# Altium PCB PCB1.PcbDoc (part 2 of 2)
Units mm, origin at the board's own origin, x right, y up, seen from the top; angles counter-clockwise.
Board outline 166.37 x 130.3 mm, 2 copper layers (Top Layer, Bottom Layer); 89 components, 70 nets, 277 pads, 63 vias.
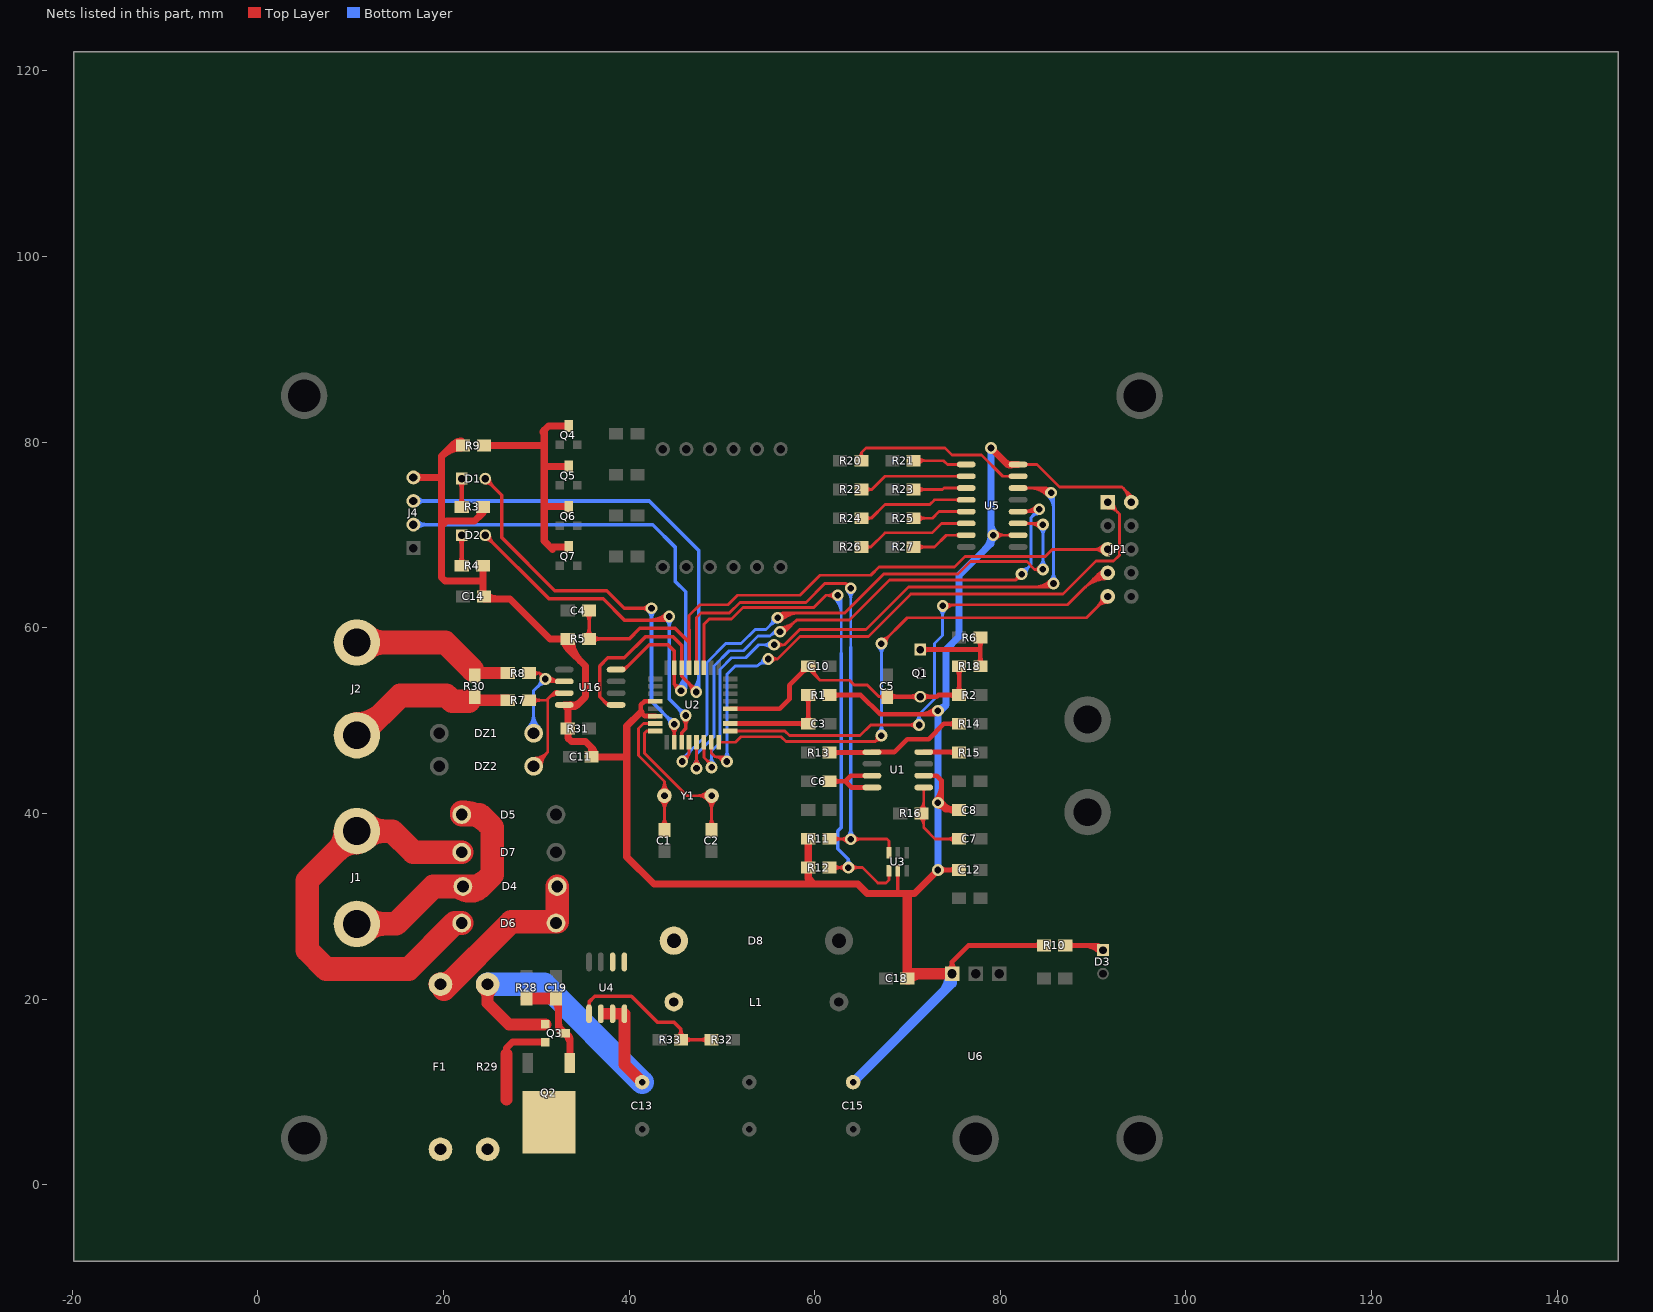
[diagram p2: the nets of this part, all layers, seen from the top]

## Via types
v1: diameter 1.27, hole 0.711, Top Layer to Bottom Layer, 63 vias

## Nets (pads, with @x,y where several pads share a name; then routed paths per layer and width w, separated by ;. In a path a pad name is that pad's centre, name@x,y a point inside that pad or via, vN(x,y) a via of type N, cw(c..) or ccw(c..) an arc to the next point about the centre after c; other vN are vias at no path point) (continued)
LCLK: U2.13 U5.12 | length 79.5
  Top Layer w0.305: v1@46.922,45.191 ccw(c46.098,46.015) 47.263,46.015 ccw(c48.428,46.015) v1@47.604,45.191 ; v1(47.263,44.85) U2.13@47.263,47.664 ; v1@56.261,59.436 ccw(c56.261,60.356) 56.911,59.705 ; v1(56.261,59.563) 56.769,59.563 58.039,60.833 63.754,60.833 68.072,65.151 81.661,65.151 ; v1@56.261,59.741 ccw(c56.261,61.396) 57.432,60.226 ; v1@56.261,60.046 ccw(c56.261,62.437) 57.952,60.746 ; v1@81.823,65.69 cw(c81.241,65.571) 81.661,65.151 ; U5.12@81.915,72.517 83.947,72.517 v1(84.201,72.771) ; v1@82.2,65.313 ccw(c82.081,64.731) 81.661,65.151 ; v1(82.296,65.786) 81.661,65.151 ; U5.12@82.423,72.517 ccw(c82.423,74.549) v1@83.86,73.112 ; U5.12@82.734,72.409 cw(c82.994,72.149) 82.994,72.517 cw(c82.994,72.885) U5.12@82.734,72.625 ; 83.159,72.517 ccw(c83.159,73.813) v1@84.075,72.897
  Bottom Layer w0.305: v1@46.922,45.191 ccw(c46.098,46.015) 47.263,46.015 ccw(c48.428,46.015) v1@47.604,45.191 ; v1(47.263,44.85) 47.263,46.374 49.149,48.26 49.149,55.88 50.8,57.531 52.324,57.531 53.898,59.105 55.168,59.105 55.626,59.563 v1(56.261,59.563) ; 55.208,59.145 cw(c55.914,58.439) v1@56.209,59.393 ; 55.566,59.503 cw(c56.083,58.986) v1@56.298,59.684 ; v1(82.296,65.786) 83.312,66.802 83.312,71.882 v1(84.201,72.771) ; v1@82.296,66.269 ccw(c82.296,67.434) 83.12,66.61 ccw(c83.944,65.786) v1@82.779,65.786 ; v1@83.718,72.771 cw(c82.553,72.771) 83.377,71.947 cw(c84.201,71.123) v1@84.201,72.288
MISO: JP1.9 U2.16 | length 65
  Top Layer w0.305: U2.16@49.663,47.664 51.474,47.664 52.07,48.26 56.388,48.26 56.896,47.752 66.548,47.752 ; v1@66.71,48.291 cw(c66.128,48.172) 66.548,47.752 ; v1@67.087,47.914 ccw(c66.968,47.332) 66.548,47.752 ; v1(67.183,48.387) 66.548,47.752 ; v1(67.183,58.293) 69.977,61.087 89.281,61.087 JP1.9@91.567,63.373 ; v1@67.183,58.776 ccw(c67.183,59.941) 68.007,59.117 ccw(c68.831,58.293) v1@67.666,58.293 ; JP1.9@90.932,63.373 cw(c89.399,63.373) 90.483,62.289 cw(c91.567,61.205) JP1.9@91.567,62.738 ; JP1.9@91.237,63.373 cw(c90.44,63.373) 91.003,62.809 cw(c91.567,62.246) JP1.9@91.567,63.043
  Bottom Layer w0.305: v1@66.842,48.728 ccw(c66.018,49.552) 67.183,49.552 ccw(c68.348,49.552) v1@67.524,48.728 ; v1@66.842,57.952 cw(c66.018,57.128) 67.183,57.128 cw(c68.348,57.128) v1@67.524,57.952 ; v1(67.183,48.387) v1(67.183,58.293)
MOSI: JP1.1 U2.15 | length 78.7
  Top Layer w0.305: U2.15@48.863,47.664 48.863,46.514 49.276,46.101 ; 49.667,46.101 cw(c49.667,45.372) v1@50.374,45.55 ; 50.058,46.101 cw(c50.058,45.47) v1@50.669,45.624 ; v1@50.078,45.476 ccw(c49.276,45.274) 49.276,46.101 ; v1@50.101,45.78 ccw(c49.831,45.894) 50.038,46.101 ; v1@50.359,46.038 cw(c50.245,46.308) 50.038,46.101 ; v1(50.546,45.593) 50.038,46.101 ; v1(54.991,56.642) 56.007,56.642 ; v1@55.365,56.337 cw(c56.007,55.814) 56.007,56.642 ; v1@55.365,56.947 ccw(c56.007,57.47) 56.007,56.642 ; JP1.1@91.567,72.898 cw(c91.567,71.365) 92.651,72.449 cw(c93.735,73.533) JP1.1@92.202,73.533 ; JP1.1@91.567,73.203 cw(c91.567,72.406) 92.131,72.969 cw(c92.694,73.533) JP1.1@91.897,73.533 ; JP1.1@91.567,73.533 92.837,72.263 92.837,67.818 92.202,67.183 90.297,67.183 86.741,63.627 70.358,63.627 65.786,59.055 58.42,59.055 56.007,56.642 ; 49.276,46.101 50.038,46.101
  Bottom Layer w0.305: v1@50.205,45.934 ccw(c49.381,46.758) 50.546,46.758 ccw(c51.711,46.758) v1@50.887,45.934 ; v1(50.546,45.593) 50.546,54.991 51.435,55.88 53.721,55.88 v1(54.991,56.642) ; v1@54.523,56.759 cw(c53.392,57.042) 53.992,56.043 cw(c54.591,55.043) v1@54.874,56.174
NetC1_2: C1.2 U2.7 Y1.2 | length 23.2
  Top Layer w0.305: U2.7@42.838,49.689 41.561,49.689 41.021,49.149 41.021,46.228 43.815,43.434 ; Y1.2@43.366,41.461 cw(c42.282,40.377) 43.815,40.377 cw(c45.348,40.377) Y1.2@44.264,41.461 ; Y1.2@43.368,42.361 ccw(c42.304,43.434) 43.815,43.434 ; C1.2@43.474,38.695 ccw(c42.65,39.519) 43.815,39.519 ccw(c44.98,39.519) C1.2@44.156,38.695 ; Y1.2@43.582,41.677 cw(c43.018,41.113) 43.815,41.113 cw(c44.612,41.113) Y1.2@44.048,41.677 ; Y1.2@43.583,42.144 ccw(c43.029,42.702) 43.815,42.702 ccw(c44.601,42.702) Y1.2@44.047,42.144 ; C1.2@43.815,38.227 Y1.2@43.815,41.91 43.815,43.434 ; Y1.2@44.262,42.361 cw(c45.326,43.434) 43.815,43.434
NetC2_2: C2.2 U2.8 Y1.1 | length 25.4
  Top Layer w0.305: U2.8@42.838,48.889 41.904,48.889 41.656,48.641 41.656,46.482 46.228,41.91 Y1.1@48.895,41.91 C2.2@48.895,38.227 ; Y1.1@48.446,42.359 cw(c47.362,43.443) 47.362,41.91 cw(c47.362,40.377) 48.446,41.461 cw(c47.362,40.377) 48.895,40.377 cw(c50.428,40.377) Y1.1@49.344,41.461 ; C2.2@48.554,38.695 ccw(c47.73,39.519) 48.895,39.519 ccw(c50.06,39.519) C2.2@49.236,38.695 ; Y1.1@48.662,42.143 cw(c48.098,42.707) 48.098,41.91 cw(c48.098,41.113) 48.662,41.677 cw(c48.098,41.113) 48.895,41.113 cw(c49.692,41.113) Y1.1@49.128,41.677
NetC3_1: C3.1 R1.1 U2.18 | length 15.8
  Top Layer w0.508: U2.18@50.888,49.689 59.277,49.689 59.309,49.721 R1.1@59.309,52.756 ; 58.185,49.689 cw(c58.185,48.66) C3.1@58.913,49.388 ; 58.339,49.689 ccw(c58.339,50.5) C3.1@58.913,49.926 ; C3.1@59.04,49.926 ccw(c58.389,50.577) 59.309,50.577 ccw(c60.229,50.577) C3.1@59.578,49.926 ; R1.1@59.04,52.486 cw(c58.389,51.836) 59.309,51.836 cw(c60.229,51.836) R1.1@59.578,52.486
NetC5_1: C5.1 C10.1 Q1.3 R2.1 R18.1 U2.20 | length 45.7
  Top Layer w0.305: C10.1@59.309,55.855 59.309,55.626 60.579,54.356 63.754,54.356 64.262,53.848 65.659,53.848 66.929,52.578 ; C10.1@59.613,55.843 ccw(c60.688,55.77) 59.927,55.008 ; C10.1@59.918,55.822 ccw(c61.578,55.711) 60.401,54.534 ; C5.1@67.413,52.315 ccw(c66.929,52.001) 66.929,52.578 ; C5.1@67.413,52.841 cw(c66.929,53.155) 66.929,52.578 ; C5.1@67.818,52.578 66.929,52.578
  Top Layer w0.508: U2.20@50.888,51.289 56.242,51.289 57.277,52.324 57.277,53.823 C10.1@59.309,55.855 ; 58.442,54.987 ccw(c57.575,55.855) C10.1@58.801,55.855 ; C10.1@58.748,55.294 cw(c59.182,54.86) C10.1@59.182,55.474 ; C5.1@67.818,52.578 73.152,52.578 73.33,52.756 R2.1@75.565,52.756 R18.1@75.565,55.855 ; C5.1@68.087,52.309 cw(c68.738,51.658) 68.738,52.578 cw(c68.738,53.498) C5.1@68.087,52.847 ; Q1.3@71.105,52.309 ccw(c70.454,51.658) 70.454,52.578 ccw(c70.454,53.498) Q1.3@71.105,52.847 ; Q1.3@71.643,52.309 cw(c72.294,51.658) 72.294,52.578 cw(c72.294,53.498) Q1.3@71.643,52.847 ; R2.1@75.169,52.486 ccw(c74.518,51.836) 74.518,52.756 ccw(c74.518,53.676) R2.1@75.169,53.025 ; R2.1@75.296,53.025 ccw(c74.645,53.676) 75.565,53.676 ccw(c76.485,53.676) R2.1@75.834,53.025 ; R18.1@75.296,55.585 cw(c74.645,54.935) 75.565,54.935 cw(c76.485,54.935) R18.1@75.834,55.585
NetC6_1: C6.1 U1.3 U1.4 | length 9.4
  Top Layer w0.508: C6.1@61.595,43.459 63.271,43.459 ; C6.1@61.991,43.19 cw(c62.642,42.54) 62.642,43.459 cw(c62.642,44.379) C6.1@61.991,43.729 ; U1.4@66.167,42.799 63.932,42.799 63.271,43.459 ; U1.3@66.167,44.069 63.881,44.069 63.271,43.459
NetC13_1: C13.1 Q3.1 R29.1 U4.2 U4.3 U4.4 | length 42.9
  Top Layer w1.27: R29.1@24.316,21.141 cw(c23.232,20.057) 24.765,20.057 cw(c26.298,20.057) R29.1@25.214,21.141 ; R29.1@24.765,21.59 24.765,19.558 27.051,17.272 Q3.1@30.988,17.272 ; 37.338,18.415 U4.3@38.227,18.415 U4.4@39.497,18.415 39.497,12.954 C13.1@41.402,11.049
  Bottom Layer w2.54: R29.1@24.765,21.59 30.861,21.59 C13.1@41.402,11.049
NetC19_1: C19.1 Q2.1 Q3.3 R28.2 | length 16.9
  Top Layer w0.762: C19.1@31.951,19.759 cw(c30.905,18.713) 32.385,18.713 ; C19.1@32.131,20.066 32.385,19.812 32.385,17.018 ; 32.385,17.595 ccw(c34.13,17.595) Q3.3@32.896,16.361 ; 32.533,16.87 cw(c31.969,16.307) Q3.3@32.766,16.307 ; Q3.3@32.864,16.38 cw(c33.05,17.018) 32.385,17.018 ; Q3.3@33.144,16.253 cw(c31.971,15.08) 33.63,15.08 ; Q3.3@33.176,16.234 cw(c32.988,15.621) 33.63,15.621 ; Q2.1@33.63,13.106 33.63,15.773 32.385,17.018
  Top Layer w1.27: R28.2@28.956,20.066 C19.1@32.131,20.066
NetD1_1: D1.1 R3.1 | length 5.9
  Top Layer w0.508: R3.1@21.702,73.294 ccw(c21.051,73.945) 21.971,73.945 ccw(c22.891,73.945) R3.1@22.24,73.294 ; D1.1@21.702,75.804 cw(c21.051,75.153) 21.971,75.153 cw(c22.891,75.153) D1.1@22.24,75.804 ; R3.1@21.971,73.025 D1.1@21.971,76.073
NetD1_2: D1.2 U2.10 | length 50.3
  Top Layer w0.381: D1.2@24.511,75.629 cw(c24.511,74.555) 25.27,75.314 cw(c26.029,76.073) D1.2@24.956,76.073 ; D1.2@24.511,76.073 26.289,74.295 26.289,69.723 32.004,64.008 37.592,64.008 39.497,62.103 v1(42.418,62.103) ; v1@42.104,61.789 ccw(c41.345,61.03) 41.345,62.103 ccw(c41.345,63.176) v1@42.104,62.417 ; v1@44.549,49.311 cw(c43.79,48.552) 44.863,48.552 cw(c45.936,48.552) v1@45.177,49.311 ; U2.10@44.863,47.664 v1(44.863,49.625)
  Bottom Layer w0.381: v1@42.104,61.789 cw(c41.345,61.03) 42.418,61.03 cw(c43.491,61.03) v1@42.732,61.789 ; v1(42.418,62.103) 42.418,52.07 v1(44.863,49.625) ; v1@44.419,49.625 ccw(c43.345,49.625) 44.104,50.384 ccw(c44.863,51.143) v1@44.863,50.069
NetD2_1: D2.1 R4.1 | length 6.2
  Top Layer w0.508: R4.1@21.702,66.944 ccw(c21.051,67.595) 21.971,67.595 ccw(c22.891,67.595) R4.1@22.24,66.944 ; D2.1@21.702,69.708 cw(c21.051,69.057) 21.971,69.057 cw(c22.891,69.057) D2.1@22.24,69.708 ; R4.1@21.971,66.675 D2.1@21.971,69.977
NetD2_2: D2.2 U2.11 | length 48
  Top Layer w0.381: D2.2@24.511,69.532 cw(c24.511,68.459) 25.27,69.218 cw(c26.029,69.977) D2.2@24.956,69.977 ; D2.2@24.511,69.977 31.369,63.119 37.211,63.119 39.497,60.833 43.942,60.833 v1(44.323,61.214) ; 42.33,60.833 ccw(c42.33,63.207) v1@44.009,61.528 ; 43.25,60.833 ccw(c43.25,62.287) v1@44.278,61.259 ; U2.11@45.663,47.664 45.663,48.711 46.101,49.149 v1(46.101,50.546) ; v1@45.787,50.232 cw(c45.028,49.473) 46.101,49.473 cw(c47.174,49.473) v1@46.415,50.232
  Bottom Layer w0.381: v1@44.009,60.9 cw(c43.25,60.141) 44.323,60.141 cw(c45.396,60.141) v1@44.637,60.9 ; v1(44.323,61.214) 44.323,52.324 v1(46.101,50.546) ; v1@45.657,50.546 ccw(c44.583,50.546) 45.342,51.305 ccw(c46.101,52.064) v1@46.101,50.99
NetD3_1: D3.1 R10.1 | length 9.9
  Top Layer w0.508: R10.1@86.995,25.781 D3.1@90.551,25.781 ; R10.1@87.391,25.512 cw(c88.042,24.861) 88.042,25.781 cw(c88.042,26.701) R10.1@87.391,26.05 ; 88.913,25.781 cw(c88.913,23.127) D3.1@90.79,25.004 ; 90.139,25.781 cw(c90.139,24.353) D3.1@91.149,25.363 ; D3.1@90.685,25.345 ccw(c90.207,25.437) D3.1@90.551,25.781 ; D3.1@90.987,25.647 cw(c90.895,26.125) D3.1@90.551,25.781 ; D3.1@91.059,25.273 D3.1@90.551,25.781
NetD4_2: D4.2 D6.2 F1.2 | length 20.7
  Top Layer w2.54: F1.2@19.685,21.59 ccw(c19.685,23.736) 21.203,22.219 ; F1.2@20.066,21.082 27.305,28.321 32.258,28.321 D4.2@32.258,32.131
NetD8_2: D8.2 L1.1 U4.5 U4.6
NetDZ1_2: DZ1.2 R8.2 U16.6 | length 23.6
  Top Layer w0.305: R8.2@29.21,55.118 30.353,55.118 ; R8.2@29.711,54.813 cw(c30.353,54.29) 30.353,55.118 ; R8.2@29.711,55.423 ccw(c30.353,55.946) 30.353,55.118 ; v1@30.515,54.579 ccw(c29.933,54.698) 30.353,55.118 ; v1@30.892,54.956 cw(c30.773,55.538) 30.353,55.118 ; v1@31.114,54.609 ccw(c32.03,55.525) U16.6@32.03,54.229 ; v1@31.329,54.824 ccw(c32.766,56.261) U16.6@32.766,54.229 ; U16.6@32.201,54.121 ccw(c31.941,53.861) 31.941,54.229 ccw(c31.941,54.597) U16.6@32.201,54.337 ; U16.6@33.02,54.229 31.242,54.229 v1(30.988,54.483) 30.353,55.118
  Bottom Layer w0.305: DZ1.2@29.107,49.252 ccw(c27.633,50.726) 29.718,50.726 ccw(c31.803,50.726) DZ1.2@30.329,49.252 ; DZ1.2@29.323,49.036 ccw(c28.369,49.99) 29.718,49.99 ccw(c31.067,49.99) DZ1.2@30.113,49.036 ; DZ1.2@29.718,48.641 29.718,53.213 v1(30.988,54.483) ; v1@30.505,54.483 cw(c29.34,54.483) 30.164,53.659 cw(c30.988,52.835) v1@30.988,54
NetDZ2_2: DZ2.2 R7.2 U16.7 | length 22.5
  Top Layer w0.305: R7.2@29.21,52.197 31.115,52.197 31.242,52.324 ; R7.2@29.678,51.856 cw(c30.502,51.032) 30.502,52.197 cw(c30.502,53.362) R7.2@29.678,52.538 ; DZ2.2@29.718,45.085 31.242,46.609 31.242,52.324 ; DZ2.2@29.718,45.644 ccw(c29.718,46.993) 30.672,46.039 ccw(c31.626,45.085) DZ2.2@30.277,45.085 ; DZ2.2@29.718,45.949 ccw(c29.718,48.034) 31.192,46.559 ccw(c32.667,45.085) DZ2.2@30.582,45.085 ; 31.312,52.394 cw(c32.309,51.396) U16.7@32.309,52.807 ; 31.661,52.743 cw(c32.003,52.401) U16.7@32.236,52.825 ; 31.832,52.914 cw(c32.309,52.437) U16.7@32.309,53.111 ; 31.949,53.031 cw(c32.207,52.773) U16.7@32.382,53.093 ; U16.7@32.201,52.851 ccw(c31.941,52.591) 31.941,52.959 ccw(c31.941,53.327) U16.7@32.201,53.067 ; U16.7@33.02,52.959 31.877,52.959 31.242,52.324
NetF1_1: F1.1 Q2.2 Q3.2 R29.2 | length 10
  Top Layer w0.762: 26.797,14.097 26.797,14.732 27.432,15.367 Q3.2@30.988,15.367
  Top Layer w1.27: 26.797,9.144 26.797,14.097
NetQ1_1: Q1.1 R6.2 R18.2 | length 13.9
  Top Layer w0.508: Q1.1@71.374,57.658 77.851,57.658 ; Q1.1@71.643,57.389 cw(c72.294,56.738) 72.294,57.658 cw(c72.294,58.578) Q1.1@71.643,57.927 ; R18.2@77.582,56.124 ccw(c76.931,56.774) 77.851,56.774 ccw(c78.771,56.774) R18.2@78.12,56.124 ; R6.2@77.582,58.684 cw(c76.931,58.034) 77.851,58.034 cw(c78.771,58.034) R6.2@78.12,58.684 ; R18.2@77.851,55.855 R6.2@77.851,58.953
NetQ4_3: Q4.3 Q5.3 Q6.3 Q7.3 R9.2 | length 30.1
  Top Layer w0.762: R9.2@24.384,79.629 30.861,79.629 ; 30.734,81.026 30.734,81.153 31.318,81.737 Q4.3@33.477,81.737 ; 30.861,73.203 31.013,73.05 Q6.3@33.477,73.05 ; 30.861,77.343 30.912,77.394 Q5.3@33.477,77.394 ; 30.861,81.28 30.861,69.342 31.75,68.453 ; 31.496,68.707 Q7.3@33.477,68.707
NetR13_2: R13.2 R14.1 U1.1 | length 18.1
  Top Layer w0.508: R13.2@61.595,46.558 U1.1@66.116,46.558 ; R13.2@61.991,46.289 cw(c62.642,45.638) 62.642,46.558 cw(c62.642,47.478) R13.2@61.991,46.828 ; U1.1@66.167,46.609 68.58,46.609 69.977,48.006 72.263,48.006 73.914,49.657 R14.1@75.565,49.657 ; R14.1@75.169,49.388 ccw(c74.518,48.737) 74.518,49.657 ccw(c74.518,50.577) R14.1@75.169,49.926
NetR15_1: R15.1 U1.8 | length 5.3
  Top Layer w0.508: U1.8@71.755,46.609 75.514,46.609 R15.1@75.565,46.558 ; 74.396,46.609 cw(c74.396,45.516) R15.1@75.169,46.289 ; 74.641,46.609 ccw(c74.641,47.355) R15.1@75.169,46.828
NetR20_1: R20.1 U5.15 | length 20.9
  Top Layer w0.305: R20.1@64.771,78.414 ccw(c64.493,78.867) 65.024,78.867 ; R20.1@65.024,78.003 65.024,78.867 ; R20.1@65.277,78.414 cw(c65.555,78.867) 65.024,78.867 ; U5.15@81.096,76.219 ccw(c80.836,75.959) 80.836,76.327 ccw(c80.836,76.695) U5.15@81.096,76.435 ; U5.15@81.915,76.327 80.264,76.327 77.978,78.613 74.803,78.613 74.041,79.375 65.532,79.375 65.024,78.867
NetR21_1: R21.1 U5.1 | length 8.2
  Top Layer w0.305: R21.1@70.663,78.003 73.889,78.003 74.295,77.597 U5.1@76.327,77.597 ; R21.1@71.131,77.662 cw(c71.955,76.838) 71.955,78.003 cw(c71.955,79.169) R21.1@71.131,78.345 ; U5.1@75.508,77.489 ccw(c75.248,77.229) 75.248,77.597 ccw(c75.248,77.965) U5.1@75.508,77.705
NetR22_1: R22.1 U5.2 | length 13.9
  Top Layer w0.305: R22.1@65.024,74.905 66.142,74.905 ; R22.1@65.531,74.607 cw(c66.142,74.129) 66.142,74.905 ; R22.1@65.531,75.202 ccw(c66.142,75.68) 66.142,74.905 ; U5.2@75.508,76.219 ccw(c75.248,75.959) 75.248,76.327 ccw(c75.248,76.695) U5.2@75.508,76.435 ; U5.2@76.327,76.327 67.564,76.327 66.142,74.905
NetR23_1: R23.1 U5.3 | length 8.1
  Top Layer w0.305: R23.1@70.663,74.905 73.762,74.905 73.914,75.057 U5.3@76.327,75.057 ; R23.1@71.131,74.563 cw(c71.955,73.739) 71.955,74.905 cw(c71.955,76.07) R23.1@71.131,75.246 ; U5.3@75.508,74.949 ccw(c75.248,74.689) 75.248,75.057 ccw(c75.248,75.425) U5.3@75.508,75.165
NetR24_1: R24.1 U5.4 | length 14
  Top Layer w0.305: R24.1@65.024,71.806 66.091,71.806 ; R24.1@65.543,71.525 cw(c66.091,71.132) 66.091,71.806 ; R24.1@65.543,72.087 ccw(c66.091,72.479) 66.091,71.806 ; U5.4@75.508,73.679 ccw(c75.248,73.419) 75.248,73.787 ccw(c75.248,74.155) U5.4@75.508,73.895 ; U5.4@76.327,73.787 72.898,73.787 72.39,73.279 67.564,73.279 66.091,71.806
NetR25_1: R25.1 U5.5 | length 8.4
  Top Layer w0.305: R25.1@70.663,71.806 72.695,71.806 73.406,72.517 U5.5@76.327,72.517 ; R25.1@71.131,71.465 cw(c71.955,70.641) 71.955,71.806 cw(c71.955,72.971) R25.1@71.131,72.147 ; U5.5@75.508,72.409 ccw(c75.248,72.149) 75.248,72.517 ccw(c75.248,72.885) U5.5@75.508,72.625
NetR26_1: R26.1 U5.6 | length 14.1
  Top Layer w0.305: R26.1@65.024,68.707 66.04,68.707 ; R26.1@65.556,68.444 cw(c66.04,68.13) 66.04,68.707 ; R26.1@65.556,68.97 ccw(c66.04,69.284) 66.04,68.707 ; U5.6@75.508,71.139 ccw(c75.248,70.879) 75.248,71.247 ccw(c75.248,71.615) U5.6@75.508,71.355 ; U5.6@76.327,71.247 73.66,71.247 72.644,70.231 67.564,70.231 66.04,68.707
NetR27_1: R27.1 U5.7 | length 8.6
  Top Layer w0.305: R27.1@70.663,68.707 72.898,68.707 74.168,69.977 U5.7@76.327,69.977 ; R27.1@71.131,68.366 cw(c71.955,67.542) 71.955,68.707 cw(c71.955,69.872) R27.1@71.131,69.048 ; U5.7@75.508,69.869 ccw(c75.248,69.609) 75.248,69.977 ccw(c75.248,70.345) U5.7@75.508,70.085
NetR32_1: R32.1 R33.2 U4.1 | length 22.4
  Top Layer w0.381: U4.1@35.687,18.415 35.687,19.685 36.322,20.32 40.259,20.32 43.053,17.526 44.831,17.526 45.593,16.764 R33.2@45.593,15.621 R32.1@48.895,15.621 ; R33.2@45.279,15.935 ccw(c44.52,16.694) 45.593,16.694 ccw(c46.666,16.694) R33.2@45.907,15.935 ; R33.2@46.034,15.307 cw(c46.793,14.548) 46.793,15.621 cw(c46.793,16.694) R33.2@46.034,15.935 ; R32.1@48.454,15.307 ccw(c47.695,14.548) 47.695,15.621 ccw(c47.695,16.694) R32.1@48.454,15.935
OUT0-5V: C7.1 R16.2 U1.5 | length 16.1
  Top Layer w0.305: R16.2@71.287,39.664 cw(c70.156,38.533) 71.755,38.533 ; R16.2@71.287,40.346 ccw(c70.156,41.477) 71.755,41.477 ; R16.2@71.502,39.879 cw(c70.892,39.269) 71.755,39.269 ; R16.2@71.502,40.131 ccw(c70.892,40.741) 71.755,40.741 ; U1.5@71.647,42.691 cw(c71.387,42.431) 71.755,42.431 cw(c72.123,42.431) U1.5@71.863,42.691 ; 71.755,39.147 cw(c72.486,39.147) R16.2@71.969,39.664 ; 71.755,40.863 ccw(c72.486,40.863) R16.2@71.969,40.346 ; U1.5@71.755,42.799 71.755,38.481 72.974,37.262 C7.1@75.565,37.262 ; C7.1@75.097,36.921 ccw(c74.273,36.097) 74.273,37.262 ccw(c74.273,38.427) C7.1@75.097,37.603
RST: C4.1 JP1.5 R5.1 U2.29 | length 77.3
  Top Layer w0.305: 46.463,59.798 46.463,61.322 47.625,62.484 50.673,62.484 51.689,63.5 58.42,63.5 60.579,65.659 66.04,65.659 66.929,66.548 75.057,66.548 76.2,67.691 84.836,67.691 85.598,68.453 JP1.5@91.567,68.453 ; JP1.5@91.118,68.004 ccw(c90.034,66.92) 90.034,68.453 ccw(c90.034,69.986) JP1.5@91.118,68.902 ; JP1.5@91.334,68.22 ccw(c90.77,67.656) 90.77,68.453 ccw(c90.77,69.25) JP1.5@91.334,68.686
  Top Layer w0.381: R5.1@35.373,59.115 ccw(c34.614,59.874) 35.687,59.874 ccw(c36.76,59.874) R5.1@36.001,59.115 ; C4.1@35.373,61.535 cw(c34.614,60.776) 35.687,60.776 cw(c36.76,60.776) C4.1@36.001,61.535 ; C4.1@35.687,61.849 R5.1@35.687,58.801 40.005,58.801 41.148,59.944 44.958,59.944 46.463,58.439 ; R5.1@36.128,58.487 cw(c36.887,57.728) 36.887,58.801 cw(c36.887,59.874) R5.1@36.128,59.115 ; U2.29@46.463,55.714 46.463,59.798
RXD: J4.3 U2.30 U16.1 | length 76.6
  Top Layer w0.381: 37.398,52.01 ccw(c37.897,52.508) U16.1@37.897,51.803 ; U16.1@38.608,51.689 37.719,51.689 36.83,52.578 36.83,55.88 37.719,56.769 39.497,56.769 41.783,59.055 44.704,59.055 45.663,58.096 45.663,54.794 47.244,53.213 v1(47.244,53.086) ; 46.395,54.062 cw(c45.42,53.086) v1@46.799,53.086 ; 46.702,53.755 ccw(c47.244,54.297) v1@47.244,53.53
  Bottom Layer w0.381: J4.3@16.764,73.66 42.164,73.66 47.498,68.326 47.498,53.34 v1(47.244,53.086) ; J4.3@17.16,73.264 cw(c18.115,72.309) 18.115,73.66 cw(c18.115,75.011) J4.3@17.16,74.056 ; v1@46.93,53.4 ccw(c45.558,54.772) 47.498,54.772 ; v1@47.199,53.131 ccw(c46.477,53.853) 47.498,53.853
SCK: JP1.7 U2.17 | length 71
  Top Layer w0.305: U2.17@50.888,48.889 56.775,48.889 57.277,48.387 64.897,48.387 66.04,49.53 v1(71.247,49.53) ; v1@70.906,49.189 ccw(c70.082,48.365) 70.082,49.53 ccw(c70.082,50.695) v1@70.906,49.871 ; v1(73.787,62.357) 73.914,62.484 87.249,62.484 90.678,65.913 ; v1@73.913,62.231 cw(c74.523,61.621) 74.523,62.484 ; v1@74.128,62.016 cw(c75.259,60.885) 75.259,62.484 ; v1@74.128,62.698 ccw(c74.645,63.215) 74.645,62.484 ; 88.965,64.2 cw(c91.567,61.599) JP1.7@91.567,65.278 ; 89.486,64.721 cw(c91.567,62.639) JP1.7@91.567,65.583 ; 90.006,65.241 cw(c91.567,63.68) JP1.7@91.567,65.888 ; 90.526,65.761 cw(c91.567,64.721) JP1.7@91.567,66.192 ; JP1.7@90.966,65.707 ccw(c90.678,65.608) 90.678,65.913 ; JP1.7@90.966,66.119 cw(c90.678,66.218) 90.678,65.913 ; JP1.7@91.567,65.913 90.678,65.913
  Bottom Layer w0.305: v1@70.91,49.876 ccw(c70.135,50.673) 71.247,50.673 ; v1(71.247,49.53) 71.247,50.673 ; v1@71.584,49.876 cw(c72.359,50.673) 71.247,50.673 ; v1@73.446,62.016 cw(c72.622,61.192) 73.787,61.192 cw(c74.952,61.192) v1@74.128,62.016 ; v1(73.787,62.357) 73.787,59.182 72.898,58.293 72.898,52.324 71.247,50.673
SCL: R11.1 U2.28 U3.3 | length 68.3
  Top Layer w0.305: U2.28@47.263,55.714 47.263,61.106 47.752,61.595 50.8,61.595 51.943,62.738 59.055,62.738 61.087,64.77 63.373,64.77 ; R11.1@61.595,37.262 67.767,37.262 68.011,37.018 U3.3@68.011,35.773 ; R11.1@62.063,36.921 cw(c62.887,36.097) 62.887,37.262 cw(c62.887,38.427) R11.1@62.063,37.603 ; 62.593,37.262 cw(c62.593,35.923) v1@63.54,36.87 ; 62.839,37.262 ccw(c62.839,38.253) v1@63.54,37.552 ; v1@63.436,64.449 ccw(c63.166,64.563) 63.373,64.77 ; v1@63.694,64.707 cw(c63.58,64.977) 63.373,64.77 ; v1(63.881,64.262) 63.373,64.77 ; v1@64.222,36.87 cw(c65.169,35.923) 65.169,37.262 ; v1@64.222,37.552 ccw(c64.923,38.253) 64.923,37.262
  Bottom Layer w0.305: v1@63.54,63.921 cw(c62.716,63.097) 63.881,63.097 cw(c65.046,63.097) v1@64.222,63.921 ; 63.881,57.912 v1(63.881,64.262)
  Bottom Layer w0.381: v1@63.567,37.525 ccw(c62.808,38.284) 63.881,38.284 ccw(c64.954,38.284) v1@64.195,37.525 ; v1(63.881,37.211) 63.881,57.912
SCLK: U2.12 U5.11 | length 82.5
  Top Layer w0.305: v1(45.72,45.593) 46.463,46.336 ; v1@45.757,46.074 ccw(c45.825,46.974) 46.463,46.336 ; v1@46.201,45.63 cw(c47.101,45.698) 46.463,46.336 ; U2.12@46.463,47.664 46.463,46.336 ; v1@55.917,61.177 cw(c56.927,60.167) 56.927,61.595 ; v1(56.007,61.087) 56.515,61.595 ; v1@56.133,60.961 cw(c57.663,59.431) 57.663,61.595 ; v1@56.194,61.532 ccw(c56.308,61.802) 56.515,61.595 ; v1@56.348,60.746 cw(c58.399,58.695) 58.399,61.595 ; v1@56.452,61.274 cw(c56.722,61.388) 56.515,61.595 ; U5.11@81.915,71.247 84.455,71.247 v1(84.582,71.12) ; U5.11@82.734,71.139 cw(c82.994,70.879) 82.994,71.247 cw(c82.994,71.615) U5.11@82.734,71.355 ; 83.11,71.247 cw(c83.11,69.648) v1@84.241,70.779 ; 83.724,71.247 ccw(c83.724,71.978) v1@84.241,71.461 ; 83.846,71.247 cw(c83.846,70.384) v1@84.456,70.994 ; v1@84.177,66.031 ccw(c83.693,65.717) 83.693,66.294 ; v1@84.177,66.557 cw(c83.693,66.871) 83.693,66.294 ; v1(84.582,66.294) 83.693,66.294 ; 56.515,61.595 63.246,61.595 67.437,65.786 75.438,65.786 76.784,67.132 82.855,67.132 83.693,66.294
  Bottom Layer w0.305: v1(45.72,45.593) 45.72,45.847 48.387,48.514 48.387,56.261 50.419,58.293 52.07,58.293 53.594,59.817 54.737,59.817 v1(56.007,61.087) ; v1@45.72,46.076 ccw(c45.72,46.627) 46.11,46.237 ; v1@45.898,45.593 cw(c46.94,45.593) 46.203,46.33 ; v1@46.203,45.593 cw(c47.981,45.593) 46.723,46.85 ; v1@55.524,61.087 cw(c54.359,61.087) 55.183,60.263 cw(c56.007,59.439) v1@56.007,60.604 ; v1@84.241,66.635 ccw(c83.417,67.459) 84.582,67.459 ccw(c85.747,67.459) v1@84.923,66.635 ; v1@84.241,70.779 cw(c83.417,69.955) 84.582,69.955 cw(c85.747,69.955) v1@84.923,70.779 ; v1(84.582,66.294) v1(84.582,71.12)
SDA: R12.1 U2.27 U3.4 | length 71.4
  Top Layer w0.305: U2.27@48.063,55.714 48.063,60.382 48.641,60.96 51.054,60.96 52.273,62.179 59.893,62.179 61.214,63.5 v1(62.484,63.5) ; R12.1@61.595,34.163 65.151,34.163 66.802,32.512 67.691,32.512 68.011,32.832 U3.4@68.011,33.823 ; R12.1@62.063,33.822 cw(c62.887,32.998) 62.887,34.163 cw(c62.887,35.328) R12.1@62.063,34.504 ; v1@62.143,63.159 ccw(c61.319,62.335) 61.319,63.5 ccw(c61.319,64.665) v1@62.143,63.841 ; v1@63.286,33.822 ccw(c62.462,32.998) 62.462,34.163 ccw(c62.462,35.328) v1@63.286,34.504 ; v1@63.968,33.822 cw(c64.792,32.998) 64.792,34.163 cw(c64.792,35.328) v1@63.968,34.504
  Bottom Layer w0.305: v1@62.143,63.159 cw(c60.399,61.415) 62.865,61.415 ; v1@62.358,63.374 cw(c61.135,62.151) 62.865,62.151 ; v1(62.484,63.5) 62.865,63.119 62.865,57.277 ; v1@62.574,63.59 cw(c61.871,62.887) 62.865,62.887
  Bottom Layer w0.381: 62.865,57.277 62.865,38.481 62.484,38.1 62.484,36.195 63.627,35.052 ; v1@63.36,34.519 ccw(c62.96,35.052) 63.627,35.052 ; v1(63.627,34.163) 63.627,35.052 ; v1@63.894,34.519 cw(c64.294,35.052) 63.627,35.052
SDI: U2.14 U5.14 | length 88.9
  Top Layer w0.305: U2.14@48.063,47.664 48.063,46.044 48.895,45.212 v1(48.895,44.958) ; 48.436,45.671 cw(c47.756,44.991) v1@48.717,44.963 ; 48.505,45.602 ccw(c48.895,45.992) v1@48.895,45.441 ; v1(55.626,58.166) 56.741,58.166 ; v1@55.978,57.836 cw(c56.741,57.12) 56.741,58.166 ; v1@55.978,58.496 ccw(c56.741,59.212) 56.741,58.166 ; U5.14@81.915,75.057 84.963,75.057 ; U5.14@82.734,74.949 cw(c82.994,74.689) 82.994,75.057 cw(c82.994,75.425) U5.14@82.734,75.165 ; 83.079,75.057 cw(c83.079,72.157) v1@85.13,74.208 ; 83.64,64.389 ccw(c83.64,66.855) v1@85.384,65.111 ; 83.815,75.057 cw(c83.815,72.893) v1@85.345,74.423 ; 84.376,64.389 ccw(c84.376,66.119) v1@85.599,64.896 ; 84.551,75.057 cw(c84.551,73.629) v1@85.561,74.639 ; v1@85.026,74.736 ccw(c84.756,74.85) 84.963,75.057 ; 85.112,64.389 ccw(c85.112,65.383) v1@85.815,64.68 ; v1@85.284,74.994 cw(c85.17,75.264) 84.963,75.057 ; v1(85.471,74.549) 84.963,75.057 ; v1(85.725,64.77) 85.344,64.389 70.104,64.389 65.532,59.817 58.392,59.817 56.741,58.166
  Bottom Layer w0.305: v1@48.554,45.299 ccw(c47.73,46.123) 48.895,46.123 ccw(c50.06,46.123) v1@49.236,45.299 ; v1(48.895,44.958) 48.895,46.736 49.784,47.625 49.784,55.499 51.054,56.769 52.578,56.769 53.975,58.166 v1(55.626,58.166) ; v1@55.285,57.825 ccw(c54.461,57.001) 54.461,58.166 ccw(c54.461,59.331) v1@55.285,58.507 ; v1@85.13,74.208 cw(c83.693,72.771) 85.725,72.771 ; v1@85.345,74.423 cw(c84.429,73.507) 85.725,73.507 ; v1@85.384,65.111 ccw(c84.56,65.935) 85.725,65.935 ccw(c86.89,65.935) v1@86.066,65.111 ; v1(85.471,74.549) 85.725,74.295 v1(85.725,64.77)
T485A+: J2.1 R8.1 R30.2 | length 22
  Top Layer w0.305: R30.2@23.368,54.864 R30.2@23.622,55.118
  Top Layer w1.27: R30.2@23.622,55.118 R8.1@26.924,55.118
  Top Layer w2.54: J2.1@10.668,58.42 20.193,58.42 R30.2@23.114,55.499 ; J2.1@11.538,57.55 cw(c13.637,55.451) 13.637,58.42 cw(c13.637,61.389) J2.1@11.538,59.29
T485B-: J2.2 R7.1 R30.1 | length 21.6
  Top Layer w0.305: R30.1@23.368,52.578 R30.1@23.749,52.197
  Top Layer w1.27: R30.1@23.368,52.451 ccw(c23.981,53.064) R30.1@23.981,52.197 ; R30.1@23.749,52.197 R7.1@26.924,52.197
  Top Layer w2.54: J2.2@10.668,48.42 11.082,48.42 15.367,52.705 20.32,52.705 20.955,52.07 R30.1@22.733,52.07 ; J2.2@10.668,49.65 ccw(c10.668,53.619) 13.474,50.812
TXD: J4.2 U2.31 U16.4 | length 67.1
  Top Layer w0.381: U16.4@38.608,55.499 39.497,55.499 42.164,58.166 44.196,58.166 44.863,57.499 44.863,53.943 ; U16.4@39.319,55.613 ccw(c39.319,56.318) 39.818,55.82 ; v1@45.149,53.225 ccw(c44.173,53.252) 44.863,53.943 ; v1@45.581,53.657 cw(c45.554,54.633) 44.863,53.943 ; v1(45.593,53.213) 44.863,53.943
  Bottom Layer w0.381: J4.2@16.764,71.12 42.545,71.12 44.958,68.707 44.958,65.024 46.101,63.881 46.101,53.721 ; J4.2@17.16,70.724 cw(c18.115,69.769) 18.115,71.12 cw(c18.115,72.471) J4.2@17.16,71.516 ; v1@45.279,53.527 ccw(c43.293,55.513) 46.101,55.513 ; v1@45.548,53.258 ccw(c44.213,54.593) 46.101,54.593 ; v1(45.593,53.213) 46.101,53.721 ; v1@45.734,53.635 ccw(c45.848,53.974) 46.101,53.721 ; v1@45.818,52.988 ccw(c45.133,53.673) 46.101,53.673 ; v1@46.015,53.354 cw(c46.354,53.468) 46.101,53.721
VCC: C8.2 C11.2 C12.2 C14.2 C15.1 C18.2 J4.4 JP1.2 R1.2 R3.2 R4.2 R5.2 R9.1 R10.2 R11.2 R12.2 R31.2 U1.6 U2.4 U2.6 U3.5 U5.10 U5.16 U6.3 U16.8 | length 315.3
  Top Layer w0.305: v1(79.248,69.977) U5.10@81.915,69.977 ; v1@79.589,69.636 cw(c80.413,68.812) 80.413,69.977 cw(c80.413,71.142) v1@79.589,70.318 ; U5.10@81.096,69.869 ccw(c80.836,69.609) 80.836,69.977 ccw(c80.836,70.345) U5.10@81.096,70.085 ; U5.16@81.915,77.597 83.947,77.597 86.36,75.184 93.091,75.184 94.107,74.168 JP1.2@94.107,73.533 ; U5.16@82.734,77.489 cw(c82.994,77.229) 82.994,77.597 cw(c82.994,77.965) U5.16@82.734,77.705 ; 93.238,75.037 cw(c91.918,73.717) JP1.2@93.778,73.561 ; 93.702,74.573 cw(c92.774,73.645) JP1.2@94.082,73.535
  Top Layer w0.381: C14.2@24.257,63.246 C14.2@24.384,63.119 ; U3.5@68.961,33.823 68.961,31.496 69.088,31.369
  Top Layer w0.508: U16.8@33.02,51.689 U16.8@33.274,51.435 ; U2.6@42.838,50.489 41.713,50.489 41.275,50.927 41.275,51.689 41.675,52.089 U2.4@42.838,52.089 ; R1.2@61.595,52.756 64.973,52.756 67.056,50.673 72.898,50.673 v1(73.279,51.054) ; R1.2@61.991,52.486 cw(c62.642,51.836) 62.642,52.756 cw(c62.642,53.676) R1.2@61.991,53.025 ; 71.439,50.673 ccw(c71.439,52.894) v1@73.01,51.323 ; U1.6@71.755,44.069 73.152,44.069 73.66,43.561 73.66,41.275 74.574,40.361 ; 72.666,50.673 ccw(c72.666,51.667) v1@73.369,50.964 ; v1@73.01,41.417 ccw(c71.439,42.988) 73.66,42.988 ; v1(73.279,33.909) C12.2@75.565,33.909 ; v1@73.279,40.767 cw(c73.279,39.847) 73.929,40.498 cw(c74.58,41.148) v1@73.66,41.148 ; v1(73.279,41.148) 74.066,40.361 C8.2@75.565,40.361 ; v1@73.279,41.275 cw(c73.279,40.355) 73.929,41.006 ; v1@73.369,41.058 ccw(c72.666,41.761) 73.66,41.761 ; v1@73.548,33.64 cw(c74.199,32.989) 74.199,33.909 cw(c74.199,34.829) v1@73.548,34.178 ; 74.092,40.843 ccw(c74.769,41.521) C8.2@75.248,40.691 ; U6.3@74.43,23.114 ccw(c73.558,24.003) 74.803,24.003 ; 74.56,40.375 ccw(c75.112,40.926) C8.2@75.501,40.251 ; U6.3@74.803,22.733 74.803,24.003 ; C12.2@75.169,33.64 ccw(c74.518,32.989) 74.518,33.909 ccw(c74.518,34.829) C12.2@75.169,34.178 ; C8.2@75.169,40.091 ccw(c74.518,39.441) 74.518,40.361 ccw(c74.518,41.28) C8.2@75.169,40.63 ; U6.3@75.176,23.114 cw(c76.048,24.003) 74.803,24.003 ; R10.2@84.313,25.512 ccw(c83.662,24.861) 83.662,25.781 ccw(c83.662,26.701) R10.2@84.313,26.05 ; R10.2@84.709,25.781 76.581,25.781 74.803,24.003
  Top Layer w0.762: J4.4@16.764,76.2 19.812,76.2 ; J4.4@17.025,75.939 cw(c17.655,75.309) 17.655,76.2 cw(c17.655,77.091) J4.4@17.025,76.461 ; 19.803,78.477 cw(c21.971,76.309) R9.1@21.971,79.375 ; 19.812,70.993 20.32,71.501 23.368,71.501 24.257,72.39 R3.2@24.257,73.025 ; 20.447,79.121 cw(c21.362,78.206) R9.1@21.871,79.396 ; 21.104,79.778 cw(c21.971,78.911) R9.1@21.971,80.137 ; R9.1@22.098,79.629 20.955,79.629 19.812,78.486 19.812,65.405 20.193,65.024 24.257,65.024 ; 23.749,71.882 ccw(c23.13,72.501) R3.2@23.905,72.907 ; R4.2@24.257,66.675 24.257,63.246 24.384,63.119 27.178,63.119 31.496,58.801 R5.2@33.401,58.801 33.401,57.785 35.306,55.88 35.306,52.578 34.417,51.689 ; C14.2@24.691,63.553 ccw(c25.737,64.599) 25.737,63.119 ; U16.8@33.02,51.689 34.417,51.689 ; R5.2@33.02,58.808 ccw(c34.519,58.787) 33.459,57.727 ; U16.8@33.274,51.435 33.401,51.308 33.401,48.133 33.782,47.752 35.306,47.752 35.941,47.117 C11.2@35.941,46.101 39.751,46.101 ; 33.401,48.229 cw(c34.448,48.229) R31.2@33.708,48.969 ; 33.401,51.076 cw(c34.344,51.076) U16.8@33.677,51.743 ; 33.401,51.185 cw(c34.105,51.185) U16.8@33.686,51.75 ; 33.401,57.881 cw(c34.448,57.881) R5.2@33.708,58.621 ; U16.8@33.687,51.627 ccw(c34.015,52.091) 34.417,51.689 ; U16.8@33.731,51.613 ccw(c33.731,53.085) 34.772,52.044 ; R5.2@33.782,58.797 ccw(c37.035,58.752) 34.734,56.452 ; 35.919,47.139 cw(c34.941,46.161) C11.2@36.321,46.066 ; 41.275,50.927 39.751,49.403 39.751,35.306 42.672,32.385 64.643,32.385 65.659,31.369 70.739,31.369 v1(73.279,33.909) ; R11.2@59.309,37.262 59.309,33.02 59.944,32.385 ; v1(78.994,79.375) 80.772,77.597 U5.16@81.915,77.597 ; 80.597,77.772 ccw(c81.204,78.379) U5.16@81.204,77.521
  Top Layer w1.016: C18.2@69.977,22.225 69.977,31.115
  Top Layer w1.27: C18.2@69.977,22.225 70.485,22.733 U6.3@74.803,22.733 ; C18.2@70.104,22.225 cw(c71.33,20.999) 71.33,22.733
  Bottom Layer w0.508: v1@73.279,50.8 v1(73.279,51.054)
  Bottom Layer w0.762: v1(73.279,33.909) 73.279,50.8 74.168,51.689 74.168,57.658 75.565,59.055 75.565,65.659 78.994,69.088 v1(78.994,79.375) ; v1@73.279,51.308 ccw(c73.279,52.534) 74.146,51.667 ; 78.365,68.459 ccw(c76.848,69.977) v1@78.994,69.977 ; 78.994,69.052 cw(c79.835,69.052) v1@79.384,69.763 ; 78.994,71.203 ccw(c80.474,71.203) v1@79.428,70.157
  Bottom Layer w1.016: C15.1@64.135,11.049 74.803,21.717 U6.3@74.803,22.733 ; 73.608,20.522 ccw(c71.396,22.733) U6.3@74.524,22.733
VIN+: D4.1 D5.2 J1.2 | length 42
  Top Layer w2.54: J1.2@10.668,28.1 14.892,28.1 18.923,32.131 24.003,32.131 ; J1.2@11.538,27.23 cw(c13.637,25.131) 13.637,28.1 cw(c13.637,31.069) J1.2@11.538,28.97 ; D4.1@21.959,31.918 ccw(c22.85,33.284) 24.003,32.131 ; D5.2@21.971,39.878 23.876,39.878 25.273,38.481 25.273,33.401 24.003,32.131 ; D4.1@22.098,31.877 ccw(c22.098,35.863) 24.916,33.044 ; D5.2@21.971,40.132 cw(c21.971,36.146) 24.789,38.965 ccw(c21.971,36.146) D5.2@21.971,40.132
VIN-: D6.1 D7.2 J1.1 | length 56.1
  Top Layer w2.54: J1.1@9.438,38.1 cw(c6.469,38.1) 8.568,36 cw(c10.668,33.901) J1.1@10.668,36.87 ; J1.1@11.538,37.23 cw(c13.637,35.131) 13.637,38.1 cw(c13.637,41.069) J1.1@11.538,38.97 ; D6.1@21.971,28.194 21.209,28.194 16.256,23.241 7.366,23.241 5.334,25.273 5.334,32.766 J1.1@10.668,38.1 14.478,38.1 16.764,35.814 D7.2@21.971,35.814
pads on no net: JP1.3 U1.7 U2.1 U2.2 U2.9 U5.9 U6.0

## Polygon pours and split planes (outlines as drawn)
GND on Top Layer (solid, remove dead copper): 2.032,2.032 98.044,2.032 98.044,88.011 2.032,88.011
GND on Bottom Layer (solid): 2.032,2.032 98.044,2.032 98.044,88.011 2.032,88.011

## Keep-outs
Keep-Out Layer:
  circle w0.254: c-5.179,79.248 r1.75
  lines w0.254: 0,0 100,0 100,90 0,90 0,0

## Other copper
Top Layer:
  rectangle net NetD8_2: 43.434,18.669 46.228,27.686
  rectangle net NetD8_2: 37.973,22.987 46.228,27.686
  rectangle net GND: 37.211,2.413 67.31,8.255
  rectangle net NetF1_1: 18.542,2.54 34.29,10.033
  rectangle net GND: 47.498,21.59 68.453,29.972
  rectangle net GND: 36.957,28.448 64.008,31.242
  rectangle net GND: 32.131,35.814 38.354,44.577
  rectangle net GND: 35.052,30.861 38.354,44.577
  rectangle net NetF1_1: 18.542,8.636 27.305,15.621
Bottom Layer:
  rectangle net GND: 29.464,34.417 35.814,42.037
  rectangle net GND: 59.436,23.241 66.167,29.337

## Silkscreen, mask and mechanical layers (free items; w line width, h text height)
Top Overlay:
  lines w0.254: 20.701,76.327 21.717,77.343 ; 20.828,70.358 21.717,71.247 ; 91.059,26.543 92.329,25.273
  text "MOSI" at 84.582,72.898 h1.52
  text "VCC" at 97.409,72.771 h1.52 r90
  text "RST" at 85.725,67.691 h1.52
  text "485" at 6.223,66.04 h2
  text "SCK" at 85.598,65.278 h1.52
  text "GND" at 97.409,62.738 h1.52 r90
  text "MISO" at 84.201,62.611 h1.52
  text "A+ B-" at 16.764,60.706 h3 r270
  text "+24VGND" at 17.399,43.053 h3 r270
  text "IN+         IN-" at 92.964,27.686 h3 r90
  text "XIAN" at 83.566,14.986 h2
  text "BOSHEN" at 83.566,12.065 h2
  text "20120905" at 83.566,9.398 h2
Bottom Overlay:
  lines w0.254: -2.503,85 5,85 5,94.568 ; 29.718,79.121 29.718,92.583 ; 66.929,64.897 103.886,64.897 ; 69.215,80.899 104.14,80.899 ; 70.231,80.391 70.231,93.091

## Dimensions
29.718,92.583 to 0,90 on Keep-Out Layer
70.231,93.091 to 100,90 on Keep-Out Layer
29.718,92.583 to 70.231,93.091 on Keep-Out Layer
104.14,80.899 to 103.886,64.897 on Keep-Out Layer
104.14,80.899 to 102.743,90 on Keep-Out Layer
0,0 to 0,90 on Keep-Out Layer
0,0 to 100,0 on Keep-Out Layer
-5.179,80.998 to -5.179,77.498 on Keep-Out Layer
-2.503,85 to 0,90 on Keep-Out Layer
0,90 to 5,94.568 on Keep-Out Layer

## Text inside footprints (layer, text, board x,y; h text height)
LED5: Bottom Overlay "DP" at 63.119,65.913 h1.52; Bottom Overlay "F" at 69.723,74.549 h1.52; Bottom Overlay "G" at 65.659,73.533 h1.52; Bottom Overlay "E" at 69.723,69.977 h1.52; Bottom Overlay "D" at 65.659,65.913 h1.52; Bottom Overlay "C" at 61.595,69.977 h1.52; Bottom Overlay "B" at 61.595,75.057 h1.52; Bottom Overlay "A" at 65.659,78.613 h1.52